# Altium PCB 20bit_40MS_ADC_DIOT.PcbDoc (part 8 of 8)
Units mm, origin at the board's own origin, x right, y up, seen from the top; angles counter-clockwise.
Board outline 222.63 x 100.1 mm, 6 copper layers (L1, L2, L3, L4, L5, L6), stack 2.522 mm thick; 616 components, 374 nets, 2097 pads, 984 vias.
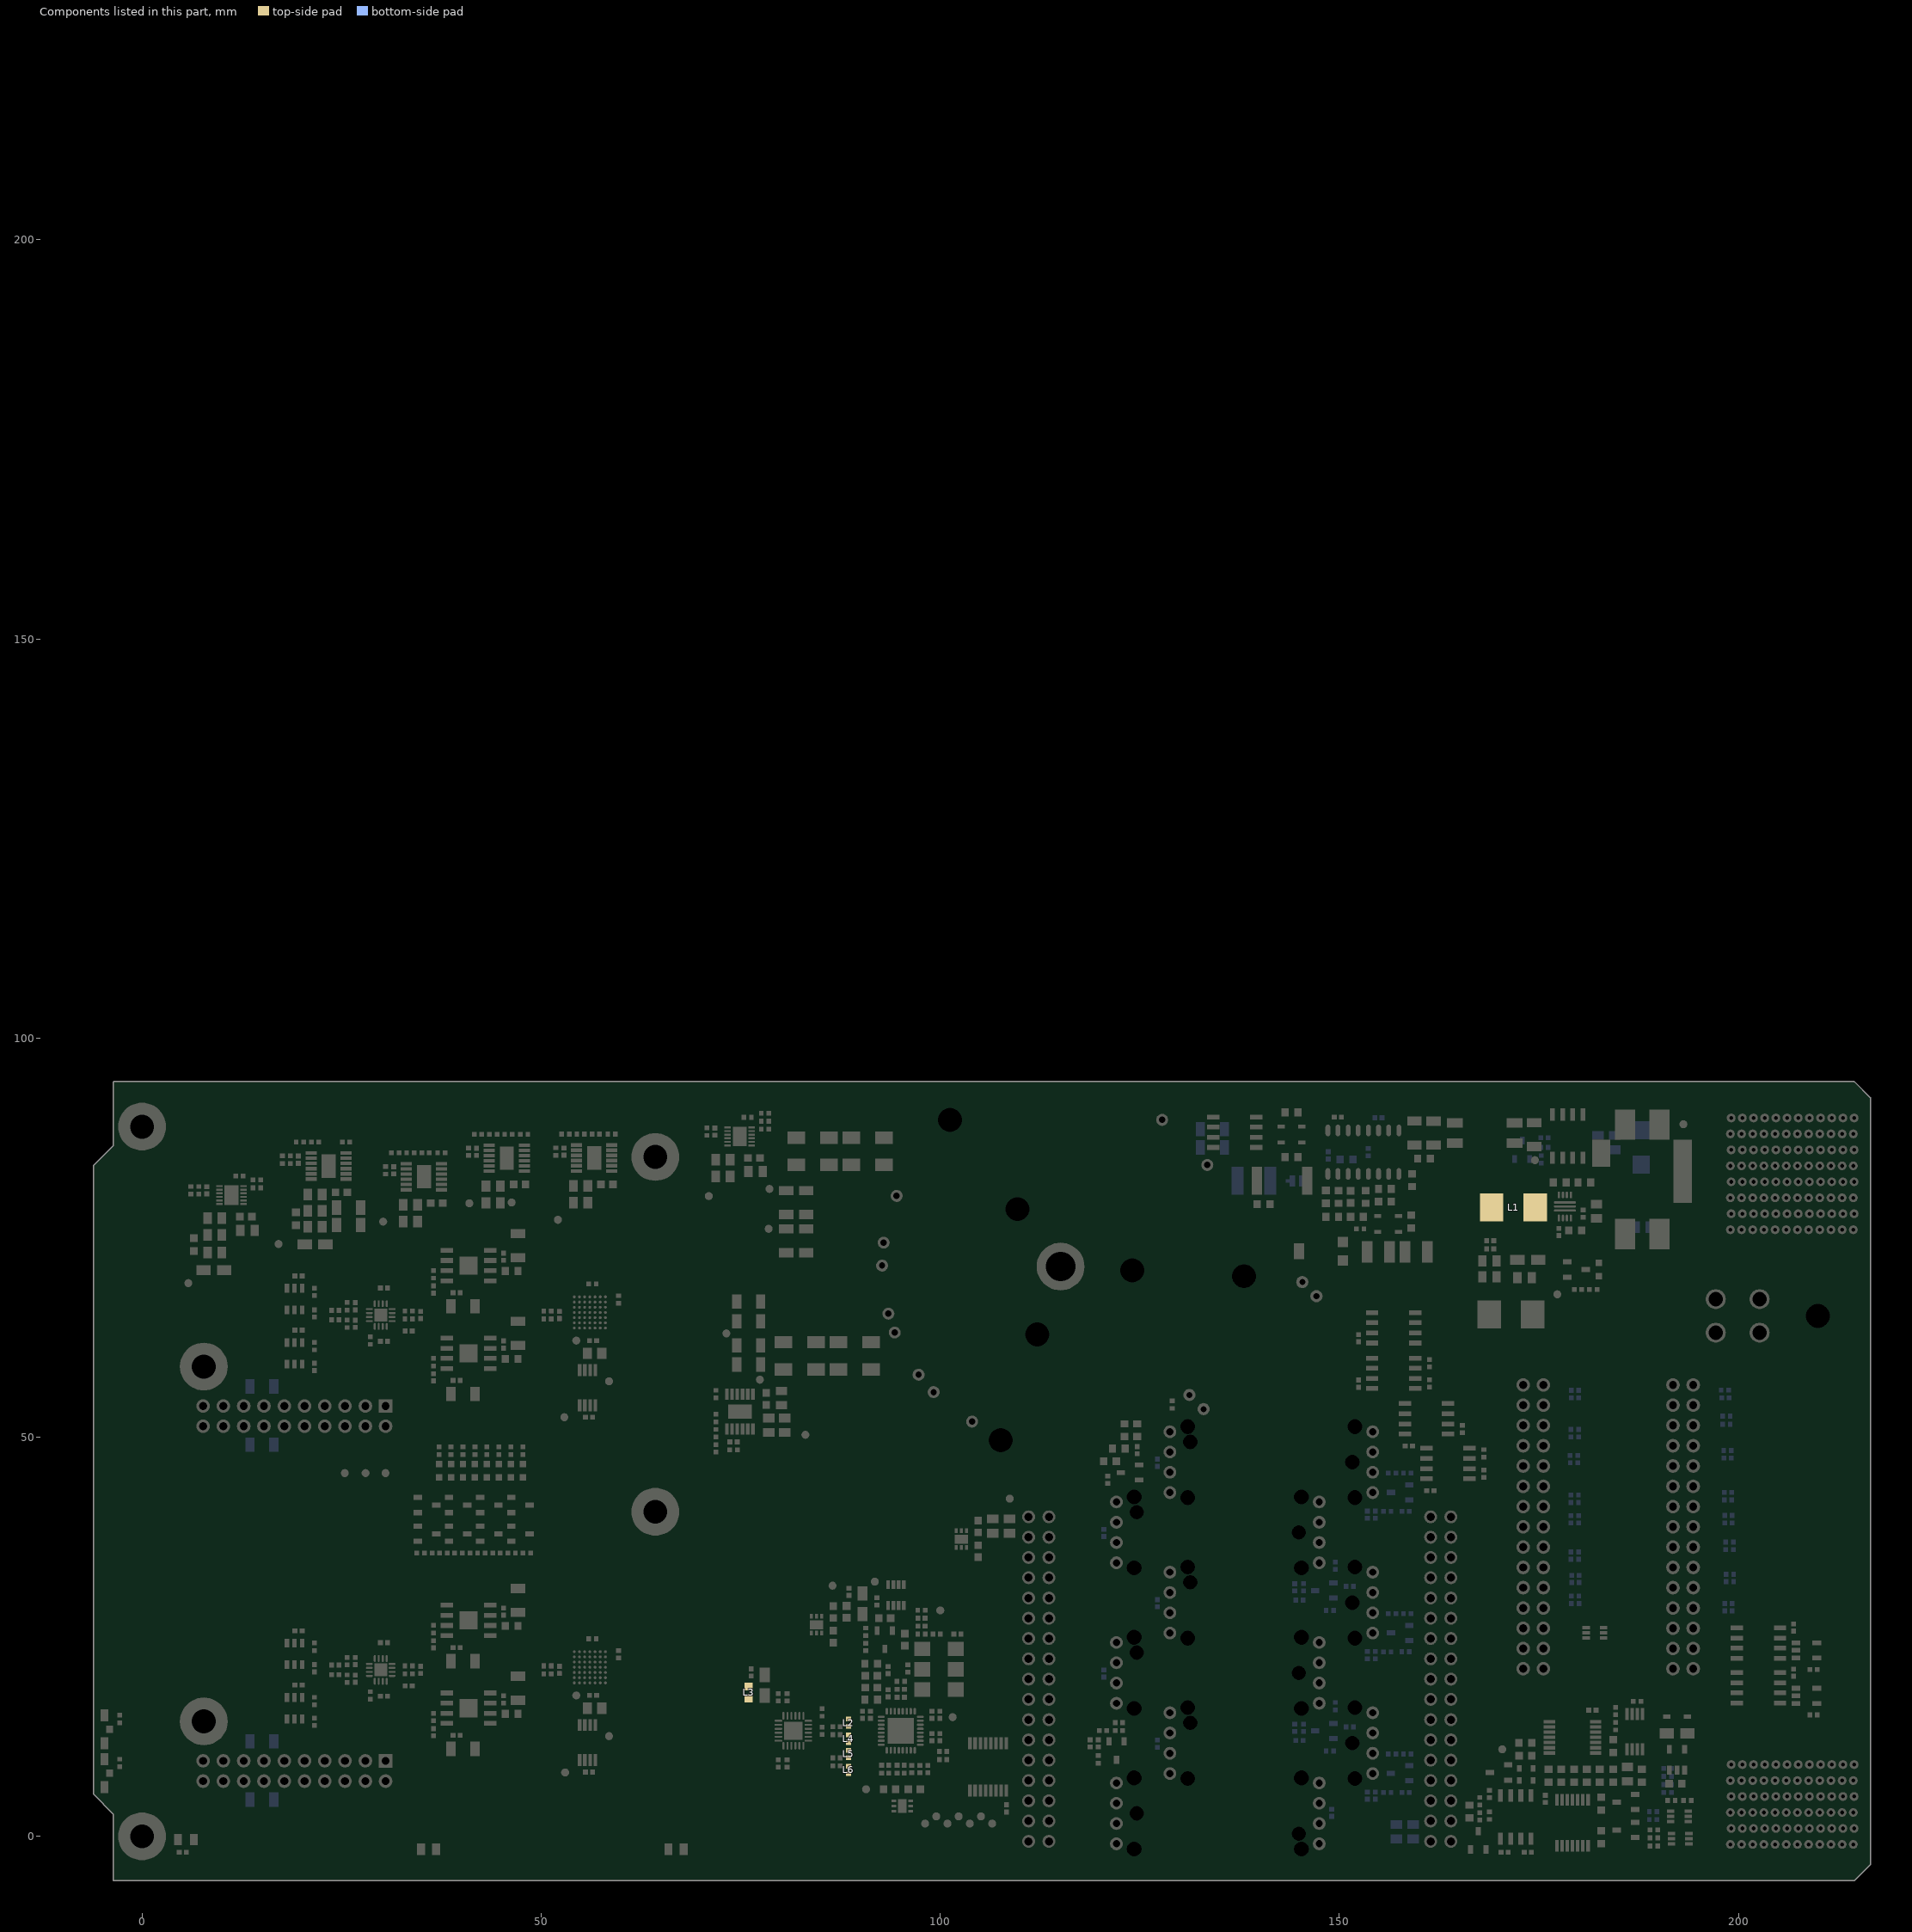
[diagram p10: the components of this part, seen from the top]

## Via types
v1: diameter 0.4, hole 0.2, L1 to L6, tented both sides, 984 vias

## Nets (pads, with @x,y where several pads share a name; then routed paths per layer and width w, separated by ;. In a path a pad name is that pad's centre, name@x,y a point inside that pad or via, vN(x,y) a via of type N, cw(c..) or ccw(c..) an arc to the next point about the centre after c; other vN are vias at no path point) (continued)
pads on no net: B36.1 B37.1 B38.1 B39.1 B40.1 B41.1 BUSH1.1 D23.5 D24.4 D24.5 D27.5 IC1A.B3 IC1A.B4 IC1A.B5 IC1A.E6 IC1A.F1 IC1A.F2 IC1A.G6 IC1A.G7 IC1B.B3 IC1B.B4 IC1B.B5 IC1B.E6 IC1B.F1 IC1B.F2 IC1B.G6 IC1B.G7 IC7.5 IC7.25 IC8.9 IC8.10 IC9.5 IC9.6 IC10.7 IC13.3 IC13.4 IC13.6 IC15.7 IC17.2 IC19.2 IC20.7 IC21.2 IC26.5 IC26.9 IC26.10 IC26.11 IC26.12 IC26.13 IC26.14 IC27.5 IC27.9 IC27.10 IC27.11 IC27.12 IC27.13 IC27.14 IC28.5 IC28.9 IC28.10 IC28.11 IC28.12 IC28.13 IC28.14 IC29.5 IC29.9 IC29.10 IC29.11 IC29.12 IC29.13 IC29.14 IC30.9 IC30.13 IC33.5 IC33.9 IC33.10 IC33.11 IC33.12 IC33.13 IC33.14 IC34.5 IC34.9 IC34.10 IC34.11 IC34.12 IC34.13 IC34.14 IC38.4 IC43.5 IC44.7 IC45.5 IC46.7 J2.5 J6.B1 J6.G3 J6.H3 J6.I2 J6.J3 J6.K3 J6.L2 J7.A3 J7.A5 J7.A7 J7.A8 J7.B2 J7.B3 J7.B4 J7.B5 J7.B6 J7.B7 J7.B8 J7.C2 J7.C4 J7.C6 J7.C8 J7.D3 J7.D5 J7.D7 J7.D8 J7.E2 J7.E3 J7.E4 J7.E5 J7.E6 J7.E7 J7.E8 J7.F2 J7.F4 J7.F6 J7.F8 J7.G3 J7.G5 J7.G7 J7.H2 J7.H3 J7.H4 J7.H5 J7.H6 J7.H7 J7.H8 J7.I2 J7.I4 J7.I6 J7.I8 J7.J3 J7.J5 J7.J7 J7.K2 J7.K3 J7.K4 J7.K5 J7.K6 J7.K7 J7.K8 J7.L2 J7.L4 J7.L6 J7.L8 LD9.3 LD11.3 M3A.1 M3B.1 M4A.1 M4B.1 MOD1.5 MOD1.6 MOD1.11 MOD1.12 MOD1.17 MOD1.18 MOD1.23 MOD1.24 MOD1.29 MOD1.30 MOD2.2 MOD2.3 MOD2.8 MOD2.9 MOD2.14 MOD2.15 MOD2.20 MOD2.21 MOD2.26 MOD2.27 OSC1.5

## Polygon pours and split planes (outlines as drawn)
GND on L1 "GND_L01_P382" (solid, pour order 382): 91.85,83.325 94.525,83.325 94.7,83.5 94.7,84.7 94.525,84.875 91.85,84.875
GND on L1 "GND_L01_P381" (solid, pour order 381): 91.85,86.725 94.525,86.725 94.7,86.9 94.7,88.1 94.525,88.275 91.85,88.275
GND on L1 "GND_L01_P380" (solid, pour order 380): 90.25,57.725 92.925,57.725 93.1,57.9 93.1,59.1 92.925,59.275 90.25,59.275
GND on L1 "GND_L01_P379" (solid, pour order 379): 90.25,61.125 92.925,61.125 93.1,61.3 93.1,62.5 92.925,62.675 90.25,62.675
P6V0 on L1 "P6V0_L01_P378" (solid, pour order 378): 72.7,59.425 73.925,58.2 75.075,58.2 75.075,67.9 73.1,67.9 72.7,67.5
GND on L1 "GND_L01_P376" (solid, pour order 376): 76.925,63.6 78.9,63.6 79.1,63.8 79.1,67.7 78.9,67.9 76.925,67.9
GND on L1 "GND_L01_P264" (solid, pour order 264): 31 vertices, not listed, extent 71.59,48.09 81.225,55.22
P15V0 on L1 "P15V0_L01_P265" (solid, pour order 265): 75.3,49.4 75.225,49.475 75.225,49.875 75,50.1 75,51.7 77.2,51.7 77.75,51.15 81.75,51.15 81.9,51 81.9,49.8 81.5,49.4
GND on L1 "GND_L01_P375" (solid, pour order 375): 79.8,73.675 79.8,71.7 80,71.5 83.9,71.5 84.1,71.7 84.1,73.675
N6V0 on L1 "N6V0_L01_P374" (solid, pour order 374): 79.8,78.475 79.8,75.525 84.1,75.525 84.1,78.475
GND on L1 "GND_L01_P365" (solid, pour order 365): 27 vertices, not listed, extent 4.8,49.6 60.4,76.7
no net on L1 "BALANCE" (solid, pour order 373): -3.6,91.8 -3.6,86.515 -6.081,84.035 -6.081,5.284 -3.6,2.803 -3.6,-2.901 216.483,-2.9 216.483,91.8
GND on L1 "GND_L01_P368" (solid, pour order 368): 27 vertices, not listed, extent 4.8,5.15 60.4,32.25
P3V3_MP on L1 "P3V3_MP_L01_P361" (solid, pour order 361): 193.15,14.75 192.9,15 192.9,16.1 193.1,16.3 194.1,16.3 194.3,16.1 194.3,15 194.05,14.75
P3V3_DIOT on L1 "P3V3_DIOT_L01_P360" (solid, pour order 360): 191.65,10.35 191.65,12.025 191.9,12.275 191.9,15 191.65,15.25 189.55,15.25 188.9,14.6 188.9,14.1 188.3,13.5 188.3,12.5 188.9,11.9 190.6,11.9 191.05,11.45 191.05,10.35
GND_DIOT on L1 "GND_DIOT_L01_P355" (solid, pour order 355): 177.025,79.55 178.55,79.55 178.85,79.85 178.85,80.625 180.275,80.625 180.5,80.4 180.5,79.5 180.25,79.25 177.025,79.25
GND_DIOT on L1 "GND_DIOT_L01_P354" (solid, pour order 354): 178.85,77.725 179,77.875 179.05,77.925 182.9,77.925 182.9,76.4 182.8,76.3 181.6,76.3 181,76.9 179.125,76.9 178.85,77.175
P5V0 on L1 "P5V0_L01_P232" (solid, pour order 232): 21 vertices, not listed, extent 42.825,60.835 48.7,62.408
P6V0 on L1 "P6V0_L01_P352" (solid, pour order 352): 17 vertices, not listed, extent 101.819,34.3 106.6,36.466
P3V3_ISO on L1 "P3V3_ISO_L01_P351" (solid, pour order 351): 103.119,37.966 103.119,40.119 104.2,41.2 114.2,41.2 114.5,40.9 114.5,39.3 114.2,39 109.618,39 109.527,39.091 103.994,39.091 103.469,38.566 103.469,37.966
GND on L1 "GND_L01_P350" (solid, pour order 350): 23 vertices, not listed, extent 101.794,35.866 114.5,38.541
GND on L1 "GND_L01_P349" (solid, pour order 349): 89.625,29.525 89.625,30 88.86,30.765 87.635,30.765 87.5,30.9 87.5,31.9 87.6,32 90.8,32 90.875,31.925 90.875,29.525
P6V0 on L1 "P6V0_L01_P344" (solid, pour order 344): 87.075,23.225 86.9,23.05 86,23.05 85.8,23.25 85.8,23.65 85.675,23.775 84.975,24.475 84.975,25.75 85.325,25.75 85.325,25.525 86.125,24.725 87.075,24.725
P3V0_REFA on L1 "P3V0_REFA_L01_P339" (solid, pour order 339): 17 vertices, not listed, extent 55.225,13.2 56.375,19.875
P3V3_CLK on L1 "P3V3_CLK_L01_P338" (solid, pour order 338): 76.5,18.275 74.925,18.275 74.6,18.6 74.6,20.1 74.885,20.385 76.61,20.385 76.61,19.385 76.5,19.275
AD9508BCPZ_VDD on L1 "AD9508BCPZ_VDD_L01_P337" (solid, pour order 337): 17 vertices, not listed, extent 75.5,14.75 80.475,18.525
GND on L1 "GND_L01_P336" (solid, pour order 336): 80.01,17.565 80.01,20.69 79.575,21.125 78.675,21.125 78.515,21.285 75.99,21.285 75.99,20.665 76.935,20.665 77.375,20.225 77.375,19.325 78.625,19.325 79.39,18.56 79.39,17.565
GND on L1 "GND_L01_P335" (solid, pour order 335): 96.75,17.485 99.185,17.485 99.4,17.7 99.4,19.1 99.215,19.285 96.75,19.285
P3V3_CLK on L1 "P3V3_CLK_L01_P334" (solid, pour order 334): 85.325,27.25 85.325,27.575 86.125,28.375 88.75,28.375 88.75,29.755 88.86,29.865 88.86,30.485 85.985,30.485 84.975,29.475 84.975,27.25
GND on L1 "GND_L01_P333" (solid, pour order 333): 83.65,25.95 84.125,25.95 84.325,25.75 84.325,25.15 84.675,25.15 84.675,25.75 84.875,25.95 85.45,25.95 86.125,25.275 87.075,25.275 87.075,27.825 86.125,27.825 85.35,27.05 83.65,27.05
P6V0 on L1 "P6V0_L01_P332" (solid, pour order 332): 98.525,6.375 98.7,6.2 98.7,5.3 98.5,5.1 98.1,5.1 97.975,4.975 97.275,4.275 96,4.275 96,4.625 96.225,4.625 97.025,5.425 97.025,6.375
GND on L1 "GND_L01_P331" (solid, pour order 331): 27 vertices, not listed, extent 93.23,2.95 96.6,10.775
P3V3_VCCO on L1 "P3V3_VCCO_L01_P330" (solid, pour order 330): 18 vertices, not listed, extent 91.7,4.275 94.5,11.625
P18V0 on L1 "L1-P18V0" (solid, pour order 329): 78.986,62.675 76.875,62.675 76.522,62.322 76.522,56.508 76.115,56.1 75,56.1 75,54.7 76.765,54.7 77.14,55.075 78.69,55.075 78.89,55.275 80.8,55.275 80.8,57.075 81.45,57.725 81.45,62.675
P3V0_REFA on L1 "P3V0_REFA_L01_P246" (solid, pour order 246): 17 vertices, not listed, extent 55.225,13.2 56.375,19.875
P6V0 on L1 "P6V0_L01_P249" (solid, pour order 249): 54.81,8.26 55.11,8.26 55.25,8.4 55.25,10.3 55.7,10.3 55.7,8.75 55.86,8.59 55.86,7.31 55.7,7.15 54.9,7.15 54.7,7.35 54.7,8.15
N5V0 on L1 "N5V0_L01_P318" (solid, pour order 318): 18.825,16.85 19.375,16.85 19.375,17.95 19.46,18.035 19.46,19.913 19.286,20.087 18.486,20.087 18.186,19.787 18.186,18.687 18.386,18.487 18.586,18.487 18.825,18.248
N5V0 on L1 "N5V0_L01_P238" (solid, pour order 238): 18.825,23.65 19.375,23.65 19.375,24.75 19.46,24.835 19.46,26.713 19.286,26.887 18.486,26.887 18.186,26.587 18.186,25.487 18.386,25.287 18.586,25.287 18.825,25.048
N5V0 on L1 "N5V0_L01_P324" (solid, pour order 324): 39.275,12.945 40.175,13.845 44.375,13.845 44.375,14.445 37.425,14.445 37.425,13.233 37.775,12.883 37.9,12.758 37.9,12.058 37.5,11.658 37.5,10.258 37.708,10.05 39.275,10.05 39.275,11.85
N5V0 on L1 "N5V0_L01_P235" (solid, pour order 235): 39.275,23.945 40.175,24.845 44.375,24.845 44.375,25.445 37.425,25.445 37.425,24.233 37.775,23.883 37.9,23.758 37.9,23.058 37.5,22.658 37.5,21.258 37.708,21.05 39.275,21.05 39.275,22.85
P5V0 on L1 "P5V0_L01_P241" (solid, pour order 241): 20.749,20.95 19.775,20.95 19.775,22.05 20.949,22.05 21.486,22.587 22.586,22.587 22.786,22.387 22.786,21.387 22.589,21.19 20.989,21.19
P5V0 on L1 "P5V0_L01_P321" (solid, pour order 321): 20.749,14.15 19.775,14.15 19.775,15.25 20.949,15.25 21.486,15.787 22.586,15.787 22.786,15.587 22.786,14.587 22.589,14.39 20.989,14.39
P5V0 on L1 "P5V0_L01_P231" (solid, pour order 231): 21 vertices, not listed, extent 42.825,16.385 48.7,17.958
P5V0 on L1 "P5V0_L01_P244" (solid, pour order 244): 21 vertices, not listed, extent 42.825,27.385 48.7,28.958
P6V0 on L1 "P6V0_L01_P248" (solid, pour order 248): 54.81,8.26 55.11,8.26 55.25,8.4 55.25,10.3 55.7,10.3 55.7,8.75 55.86,8.59 55.86,7.31 55.7,7.15 54.9,7.15 54.7,7.35 54.7,8.15
P5V0 on L1 "P5V0_L01_P243" (solid, pour order 243): 21 vertices, not listed, extent 42.825,27.385 48.7,28.958
P5V0 on L1 "P5V0_L01_P240" (solid, pour order 240): 20.749,20.95 19.775,20.95 19.775,22.05 20.949,22.05 21.486,22.587 22.586,22.587 22.786,22.387 22.786,21.387 22.589,21.19 20.989,21.19
P5V0 on L1 "P5V0_L01_P320" (solid, pour order 320): 20.749,14.15 19.775,14.15 19.775,15.25 20.949,15.25 21.486,15.787 22.586,15.787 22.786,15.587 22.786,14.587 22.589,14.39 20.989,14.39
N5V0 on L1 "N5V0_L01_P323" (solid, pour order 323): 39.275,12.945 40.175,13.845 44.375,13.845 44.375,14.445 37.425,14.445 37.425,13.233 37.775,12.883 37.9,12.758 37.9,12.058 37.5,11.658 37.5,10.258 37.708,10.05 39.275,10.05 39.275,11.85
N5V0 on L1 "N5V0_L01_P234" (solid, pour order 234): 39.275,23.945 40.175,24.845 44.375,24.845 44.375,25.445 37.425,25.445 37.425,24.233 37.775,23.883 37.9,23.758 37.9,23.058 37.5,22.658 37.5,21.258 37.708,21.05 39.275,21.05 39.275,22.85
N5V0 on L1 "N5V0_L01_P317" (solid, pour order 317): 18.825,16.85 19.375,16.85 19.375,17.95 19.46,18.035 19.46,19.913 19.286,20.087 18.486,20.087 18.186,19.787 18.186,18.687 18.386,18.487 18.586,18.487 18.825,18.248
N5V0 on L1 "N5V0_L01_P237" (solid, pour order 237): 18.825,23.65 19.375,23.65 19.375,24.75 19.46,24.835 19.46,26.713 19.286,26.887 18.486,26.887 18.186,26.587 18.186,25.487 18.386,25.287 18.586,25.287 18.825,25.048
N5V0 on L1 "N5V0_L01_P322" (solid, pour order 322): 39.275,57.395 40.175,58.295 44.375,58.295 44.375,58.895 37.425,58.895 37.425,57.683 37.775,57.333 37.9,57.208 37.9,56.508 37.5,56.108 37.5,54.708 37.708,54.5 39.275,54.5 39.275,56.3
N5V0 on L1 "N5V0_L01_P236" (solid, pour order 236): 18.825,68.1 19.375,68.1 19.375,69.2 19.46,69.285 19.46,71.163 19.286,71.337 18.486,71.337 18.186,71.037 18.186,69.937 18.386,69.737 18.586,69.737 18.825,69.498
P5V0 on L1 "P5V0_L01_P239" (solid, pour order 239): 20.749,65.4 19.775,65.4 19.775,66.5 20.949,66.5 21.486,67.037 22.586,67.037 22.786,66.837 22.786,65.837 22.589,65.64 20.989,65.64
P5V0 on L1 "P5V0_L01_P319" (solid, pour order 319): 20.749,58.6 19.775,58.6 19.775,59.7 20.949,59.7 21.486,60.237 22.586,60.237 22.786,60.037 22.786,59.037 22.589,58.84 20.989,58.84
N5V0 on L1 "N5V0_L01_P316" (solid, pour order 316): 18.825,61.3 19.375,61.3 19.375,62.4 19.46,62.485 19.46,64.363 19.286,64.537 18.486,64.537 18.186,64.237 18.186,63.137 18.386,62.937 18.586,62.937 18.825,62.698
P12V0_EEM on L1 "P12V0_EEM_L01_P314" (solid, pour order 314): 178.25,78.55 180.03,78.55 180.9,79.42 180.9,80.5 181.2,80.8 183.3,80.8 183.5,80.6 183.5,80.1 184,79.6 184,78.9 183.24,78.14 180.24,78.14 180.13,78.25 178.25,78.25
GND_DIOT on L1 "GND_DIOT_L01_P300" (solid, pour order 300): 167.375,69.4 167.375,70.325 166.6,71.1 166.6,74.5 167.01,74.91 168.76,74.91 168.76,73.135 168.425,72.8 168.425,69.4
3V3 on L1 "3V3_L01_P301" (solid, pour order 301): 169.04,74.91 167.6,76.35 167.6,80.55 170.55,80.55 170.55,71.725 170.225,71.4 170.225,69.4 170.25,69.375 170.25,63.65 167.3,63.65 167.3,67.15 167.55,67.15 169.175,68.775 169.175,72.8 169.04,72.935
P3V3 on L1 "P3V3_L01_P302" (solid, pour order 302): 172.75,63.65 172.75,67.45 173.575,68.275 173.575,70.7 174,71.125 174,72.825 176.675,72.825 177,72.5 177,70.2 175.7,68.9 175.7,63.65
GND_DIOT on L1 "GND_DIOT_L01_P303" (solid, pour order 303): 172.825,69.3 172.825,71.2 173.2,71.575 173.2,72.825 171.4,72.825 171.1,72.525 171.1,69.5 171.3,69.3 171.775,69.3
NetIC36_2 on L1 "NETIC36_2_L01_P299" (solid, pour order 299): 173.05,77.05 176,77.05 176.4,77.45 176.4,78.4 176.75,78.75 178.25,78.75 178.25,79.05 176.75,79.05 176.4,79.4 176.4,80.15 176,80.55 173.05,80.55
NetC172_2 on L1 "NETC172_2_L01_P310" (solid, pour order 310): 184.55,73.55 184.55,78.55 184.9,78.9 186.7,78.9 187.05,78.55 187.05,73.55
NetC172_1 on L1 "NETC172_1_L01_P309" (solid, pour order 309): 188.85,73.55 188.85,78.55 189.2,78.9 191,78.9 191.35,78.55 191.35,73.55
GND_DIOT on L1 "GND_DIOT_L01_P307" (solid, pour order 307): 17 vertices, not listed, extent 181.65,79.35 194.15,91.05
P12V0_EEM on L1 "P12V0_EEM_L01_P305" (solid, pour order 305): 177.665,91.465 177.9,91.7 186.6,91.7 187.05,91.25 187.05,87.25 184.55,87.25 184.55,88.05 184.2,88.4 178.3,88.4 177.665,89.035
NetB15_1 on L1 "NETB15_1_L01_P304" (solid, pour order 304): 170.95,87.43 175.77,87.43 176.9,86.3 180.6,86.3 180.805,86.095 180.805,84.225 180.48,83.9 171.8,83.9 170.95,84.75 170.95,86.23
GND_DIOT on L1 "GND_DIOT_L01_P298" (solid, pour order 298): 172.95,88.77 172.95,90.045 173,90.095 173,90.52 172.85,90.67 171.05,90.67 170.9,90.52 170.9,90.095 170.95,90.045 170.95,88.77
GND_DIOT on L1 "GND_DIOT_L01_P297" (solid, pour order 297): 175.3,88.825 175.3,89.975 175.4,90.075 175.4,90.6 175.3,90.7 173.5,90.7 173.4,90.6 173.4,90.075 173.5,89.975 173.5,88.825
NetC137_2 on L1 "NETC137_2_L01_P295" (solid, pour order 295): 154.175,71.85 152.25,71.85 152.1,72 152.1,74.4 152.25,74.55 154.175,74.55
GND_LLC on L1 "GND_LLC_L01_P293" (solid, pour order 293): 145.3,80.35 147.05,80.35 147.2,80.5 147.2,83.7 147.05,83.85 145.3,83.85
P12V0_LLC on L1 "P12V0_LLC_L01_P291" (solid, pour order 291): 160.95,83.05 161.1,82.9 162.9,82.9 163.2,83.2 163.2,85.3 163.6,85.7 164.92,85.7 165.45,86.23 165.45,87.43 161.155,87.43 160.9,87.175 160.9,85.45 160.95,85.4
LLC_VCC on L1 "LLC_VCC_L01_P290" (solid, pour order 290): 154.425,87.175 153.935,87.665 153.935,88.425 153.335,88.425 153.335,86.265 154,85.6 158.65,85.6 159.4,84.85 159.4,84.45 159.35,84.4 160.25,84.4 160.25,85.4 160.3,85.45 160.3,87.175
GND_LLC on L1 "GND_LLC_L01_P289" (solid, pour order 289): 17 vertices, not listed, extent 155.4,88.425 165.45,91.4
NetC137_1 on L1 "NETC137_1_L01_P287" (solid, pour order 287): 139,80.35 139.25,80.1 139.25,78.7 140.15,78.7 140.15,80.2 140.3,80.35 142.85,80.35 143,80.5 143,83.7 142.85,83.85 139,83.85
LLC_OUT on L1 "LLC_OUT_L01_P286" (solid, pour order 286): 20 vertices, not listed, extent 126.7,85.995 140.375,90.9
P12V0_LLC on L1 "P12V0_LLC_L01_P283" (solid, pour order 283): 134.975,87.865 132.735,87.865 132,88.6 130.7,88.6 130.4,88.3 130.4,85.7 130.7,85.4 134.6,85.4 134.975,85.775 134.975,86.595
STRIP2 on L1 "esd1" (solid, pour order 280): 66.643,-3.243 66.45,-3.05 66.45,-0.875 65.45,-0.875 65.45,-3.05 65.257,-3.243 42.58,-3.243 42.58,-4.512 97.58,-4.512 97.58,-3.243
STRIP3 on L1 "STRIP3_L01_P279" (solid, pour order 279): 215.113,-4.512 215.13,-4.512 216.37,-3.272 117.58,-3.272 117.58,-4.512
STRIP1 on L1 "esd1" (solid, pour order 278): 35.6,-3.1 35.45,-2.95 35.45,-0.875 34.45,-0.875 34.45,-2.95 34.3,-3.1 4.955,-3.1 4.955,1.563 -2.17,1.563 -2.17,-4.462 37.58,-4.462 37.58,-3.1
P6V0 on L1 "P6V0_L01_P257" (solid, pour order 257): 37.193,78.35 37.318,78.225 38.518,78.225 38.818,78.525 38.818,82.325 38.618,82.525 36.818,82.525 36.818,80.175 37.193,79.8
P6V0 on L1 "P6V0_L01_P260" (solid, pour order 260): 24.875,84.513 27.287,84.513 27.95,83.85 27.95,83.187 27.95,75.662 25.975,75.662 25.775,75.862 25.775,79.662 25.25,80.187 25.25,81.137 24.875,81.512
P6V0 on L1 "P6V0_L01_P251" (solid, pour order 251): 47.568,80.675 47.693,80.55 48.893,80.55 49.193,80.85 49.193,84.65 48.993,84.85 47.193,84.85 47.193,82.5 47.568,82.125
P6V0 on L1 "P6V0_L01_P250" (solid, pour order 250): 58.518,80.7 58.643,80.575 59.843,80.575 60.143,80.875 60.143,84.675 59.943,84.875 58.143,84.875 58.143,82.525 58.518,82.15
P6V0 on L1 "P6V0_L01_P247" (solid, pour order 247): 54.81,52.71 55.11,52.71 55.25,52.85 55.25,54.75 55.7,54.75 55.7,53.2 55.86,53.04 55.86,51.76 55.7,51.6 54.9,51.6 54.7,51.8 54.7,52.6
P2V5_VREF on L1 "P2V5_VREF_L01_P275" (solid, pour order 275): 20 vertices, not listed, extent 90.34,24.9 96.025,29.475
P3V3_DAC on L1 "P3V3_DAC_L01_P276" (solid, pour order 276): 24 vertices, not listed, extent 87.75,23.865 93.7,29.475
GND on L1 "GND_L01_P258" (solid, pour order 258): 33 vertices, not listed, extent 30.208,76.3 37.308,85.935
P3V3_ADC on L1 "P3V3_ADC_L01_P259" (solid, pour order 259): 31.518,82.225 31.593,82.3 31.993,82.3 32.218,82.525 33.818,82.525 33.818,80.325 33.268,79.775 33.268,75.775 33.118,75.625 31.918,75.625 31.518,76.025
N5V0 on L1 "N5V0_L01_P274" (solid, pour order 274): 8.75,73.85 6.05,73.85 6,73.8 6,70.725 6.425,70.3 8.6,70.3 8.6,72.25 8.75,72.4
GND on L1 "GND_L01_P273" (solid, pour order 273): 17 vertices, not listed, extent 5.79,80.025 10.1,80.825
GND on L1 "GND_L01_P272" (solid, pour order 272): 9.45,72.4 9.4,72.35 9.4,70.3 11.2,70.3 11.2,71.525 12.475,72.8 12.475,74.6 12.825,74.95 12.825,76.625 12.725,76.725 12.725,78.1 12.675,78.15 9.45,78.15
N6V0 on L1 "N6V0_L01_P271" (solid, pour order 271): 17 vertices, not listed, extent 10.325,75.225 14.625,81.55
LT3094_N5V0 on L1 "LT3094_N5V0_L01_P270" (solid, pour order 270): 7.65,74.6 7.5,74.45 6,74.45 6,75.825 7.4,77.225 7.4,78.925 8.3,79.825 9.15,79.825 9.3,79.975 9.3,80.225 10.1,80.225 10.1,79.075 9.675,79.075 8.75,78.15 8.75,74.6
GND on L1 "GND_L01_P269" (solid, pour order 269): 70.458,87.515 72.128,87.515 72.268,87.375 72.668,87.375 72.768,87.475 72.768,87.675 72.868,87.775 73.768,87.775 73.768,88.025 72.818,88.025 72.668,88.175 72.118,88.175 72.078,88.135 70.498,88.135 70.458,88.095
GND on L1 "GND_L01_P268" (solid, pour order 268): 73.118,81.95 73.118,85.5 76.343,85.5 76.393,85.45 76.393,84.075 76.493,83.975 76.493,82.3 76.143,81.95
N18V0 on L1 "N18V0_L01_P267" (solid, pour order 267): 26 vertices, not listed, extent 73.993,80.325 84.1,88.9
N15V0 on L1 "N15V0_L01_P266" (solid, pour order 266): 18 vertices, not listed, extent 70.6,81.3 73.768,87.575
P5V0 on L1 "P5V0_L01_P263" (solid, pour order 263): 18.825,77.087 21.325,77.087 21.325,74.837 21.275,74.787 21.275,73.537 18.7,73.537 18.275,73.962 18.275,76.537
LT3045_P5V0 on L1 "LT3045_P5V0_L01_P262" (solid, pour order 262): 21.325,77.637 18.825,77.637 18.775,77.687 18.775,79.762 19.575,80.562 19.575,83.562 19.65,83.637 20.05,83.637 20.275,83.862 21.875,83.862 21.875,81.663 21.325,81.112
GND on L1 "GND_L01_P261" (solid, pour order 261): 37 vertices, not listed, extent 17.265,73.537 25.365,87.272
GND on L1 "GND_L01_P253" (solid, pour order 253): 33 vertices, not listed, extent 40.583,78.625 47.683,88.26
P1V1_VDD on L1 "P1V1_VDD_L01_P255" (solid, pour order 255): 41.893,84.55 41.968,84.625 42.368,84.625 42.593,84.85 44.193,84.85 44.193,82.65 43.643,82.1 43.643,78.1 43.493,77.95 42.293,77.95 41.893,78.35
P1V1_IO on L1 "P1V1_IO_L01_P254" (solid, pour order 254): 52.843,84.575 52.918,84.65 53.318,84.65 53.543,84.875 55.143,84.875 55.143,82.675 54.593,82.125 54.593,78.125 54.443,77.975 53.243,77.975 52.843,78.375
GND on L1 "GND_L01_P252" (solid, pour order 252): 33 vertices, not listed, extent 51.533,78.65 58.633,88.285
P3V0_REFB on L1 "P3V0_REFB_L01_P245" (solid, pour order 245): 17 vertices, not listed, extent 55.225,57.65 56.375,64.325
P5V0 on L1 "P5V0_L01_P242" (solid, pour order 242): 21 vertices, not listed, extent 42.825,71.835 48.7,73.408
N5V0 on L1 "N5V0_L01_P233" (solid, pour order 233): 39.275,68.395 40.175,69.295 44.375,69.295 44.375,69.895 37.425,69.895 37.425,68.683 37.775,68.333 37.9,68.208 37.9,67.508 37.5,67.108 37.5,65.708 37.708,65.5 39.275,65.5 39.275,67.3
no net on L6 "BALANCE" (solid, pour order 372): -3.6,91.8 -3.6,86.515 -6.081,84.035 -6.081,5.284 -3.6,2.803 -3.6,-2.901 216.483,-2.9 216.483,91.8
P12V0_EEM on L6 "L6-P12V0_EEM" (solid, pour order 364): 48 vertices, not listed, extent 168.5,5.19 195.6,90.7
GND_DIOT on L6 "GND_DIOT_L06_P357" (solid, pour order 357): 156.407,0.925 156.407,2.607 156.8,3 164.5,3 165,2.5 165,1.2 164.5,0.7 156.632,0.7
P3V3 on L6 "P3V3_L06_P356" (solid, pour order 356): 156.407,0.225 164.475,0.225 164.8,-0.1 164.8,-1.1 164.4,-1.5 156.6,-1.5 156.407,-1.307
P15V0 on L6 "P15V0_L06_P353" (solid, pour order 353): 76.1,46.8 80.6,51.3 81.8,51.3 82.6,50.5 82.6,49.5 77.4,44.3 61.6,44.3 58.4,41.1 55.1,41.1 54.4,41.8 54.4,43.2 55.1,43.9 57.4,43.9 60.3,46.8
P1V1_VDD on L6 "P1V1_VDD_L06_P327" (solid, pour order 327): 41.9,79.7 41.9,78.3 42.3,77.9 43.4,77.9 43.7,78.2 43.7,79.7 43.5,79.9 42.1,79.9
P1V1_VDD on L6 "P1V1_VDD_L06_P326" (solid, pour order 326): 53.7,67.35 53.3,67.75 53.3,68.75 53.5,68.95 55.5,68.95 55.7,68.75 55.7,67.55 55.5,67.35 55.4,67.35
P1V1_VDD on L6 "P1V1_VDD_L06_P325" (solid, pour order 325): 53.7,22.9 53.3,23.3 53.3,24.3 53.5,24.5 55.5,24.5 55.7,24.3 55.7,23.1 55.5,22.9 55.4,22.9
P12V0_DIOT on L6 "P12V0_DIOT_L06_P315" (solid, pour order 315): 45 vertices, not listed, extent 191.3,-2.8 215.9,8.81
NetC172_2 on L6 "NETC172_2_L06_P312" (solid, pour order 312): 17 vertices, not listed, extent 184.6,61.5 199,78.9
NetC172_1 on L6 "NETC172_1_L06_P311" (solid, pour order 311): 201,68.2 197.9,71.3 192.625,71.3 188.35,75.575 188.35,78.55 188.7,78.9 191,78.9 195.9,74 199.7,74 204.5,69.2 204.5,62 204,61.5 201.5,61.5 201,62
GND_DIOT on L6 "GND_DIOT_L06_P308" (solid, pour order 308): 181.675,86.55 181.675,83.825 182.5,83 188.875,83 188.875,85.3 186.475,85.3 185.225,86.55
NetC137_2 on L6 "NETC137_2_L06_P296" (solid, pour order 296): 152.8,75.1 151.2,76.7 141,76.7 138,79.7 138,83.85 134.95,83.85 133.9,84.9 133,84.9 132.3,84.2 132.3,79.4 140.2,71.5 152.5,71.5 152.8,71.8 152.8,73.9
GND_LLC on L6 "GND_LLC_L06_P294" (solid, pour order 294): 147.2,80.6 147,80.4 145.2,80.4 144.95,80.65 144.95,83.65 145.2,83.9 147,83.9 147.2,83.7
LLC_OUT on L6 "LLC_OUT_L06_P292" (solid, pour order 292): 144.5,86.6 143.8,85.9 140.4,85.9 140.2,86.1 140.2,87.3 141.3,88.4 151.2,88.4 151.7,87.9 151.7,86.6 151.5,86.4 150.4,86.4 150.2,86.6
NetC137_1 on L6 "NETC137_1_L06_P288" (solid, pour order 288): 20 vertices, not listed, extent 137.6,80.35 144.45,89.4
GND_LLC on L6 "GND_LLC_L06_P285" (solid, pour order 285): 136.175,89.5 136.175,86.425 137,85.6 137,84.9 136.6,84.5 134.9,84.5 134.3,85.1 134.3,89.2 134.6,89.5
P12V0_LLC on L6 "P12V0_LLC_L06_P284" (solid, pour order 284): 133.175,85.4 130.7,85.4 130.4,85.7 130.4,88.3 130.7,88.6 131.7,88.6 132.025,88.925 132.025,89.5 133.175,89.5
STRIP2 on L6 "esd1" (solid, pour order 282): 66.643,-3.243 66.4,-3 66.4,-2.5 66.3,-2.4 65.6,-2.4 65.5,-2.5 65.5,-3 65.257,-3.243 42.58,-3.243 42.58,-4.512 97.58,-4.512 97.58,-3.243
STRIP3 on L6 "STRIP3_L06_P281" (solid, pour order 281): 215.113,-4.512 215.13,-4.512 216.37,-3.272 117.58,-3.272 117.58,-4.512
STRIP1 on L6 "esd1" (solid, pour order 277): -2.17,0.978 4.955,0.978 4.955,-2.962 37.58,-2.962 37.58,-4.462 -2.17,-4.462
GND_DIOT on L6 "GND_DIOT_L06_P256" (solid, pour order 256): 202.2,47.714 202.2,41.789 216.2,41.789 216.2,47.714
no net on L4 "BALANCE" (solid, pour order 371): -3.6,91.8 -3.6,86.515 -6.081,84.035 -6.081,5.284 -3.6,2.803 -3.6,-2.901 216.483,-2.9 216.483,91.8
P12V0_LLC on L4 "P12V0_LLC_L04_P369" (solid, pour order 369): 129.8,83.5 133.8,79.5 134,79.7 155.1,79.7 155.8,80.4 161.2,80.4 163.7,82.9 163.7,90.8 162.3,92.2 132.1,92.2 129.8,89.9 129.8,87.5
P3V3_MP on L4 "P3V3_MP_L04_P362" (solid, pour order 362): 29 vertices, not listed, extent 183.2,10.3 210.7,22.2
P3V3_DIOT on L4 "P3V3_DIOT_L04_P359" (solid, pour order 359): 24 vertices, not listed, extent 165.8,-2.7 192,13.7
P3V3 on L4 "P3V3_L04_P358" (solid, pour order 358): 38 vertices, not listed, extent 143.3,-2.3 177,72.8
AD9508BCPZ_VDD on L4 "AD9508BCPZ_VDD_L04_P348" (solid, pour order 348): 77.3,17.1 76.4,16.2 76.4,10 77.4,9 80,9 80.6,9.6 80.6,13.6 81.5,14.5 85.9,14.5 86.5,15.1 86.5,16.5 85.9,17.1 82.2,17.1
P3V3_VCCO on L4 "P3V3_VCCO_L04_P347" (solid, pour order 347): 88.3,6.3 87.1,7.5 87.1,15.1 87.5,15.5 88.3,15.5 88.7,15.1 88.7,8.4 89.3,7.8 92.8,7.8 93.1,7.5 93.1,6.8 92.6,6.3
P3V3_DAC on L4 "P3V3_DAC_L04_P346" (solid, pour order 346): 87.8,23.3 90.1,21 102,21 102.9,21.9 102.9,26.5 101.6,27.8 91.5,27.8 90.7,27 88.4,27 87.8,26.4
P3V3_CLK on L4 "P3V3_CLK_L04_P345" (solid, pour order 345): 21 vertices, not listed, extent 74.2,10.8 101.3,32.8
P6V0 on L4 "P6V0_L04_P343" (solid, pour order 343): 71 vertices, not listed, extent 25.6,4.6 106.7,83.8
P5V0 on L4 "P5V0_L04_P342" (solid, pour order 342): 55 vertices, not listed, extent 12,7.7 50.3,76.2
N5V0 on L4 "N5V0_L04_P341" (solid, pour order 341): 46 vertices, not listed, extent 5,9.3 39.7,73
P3V3_ADC on L4 "P3V3_ADC_L04_P340" (solid, pour order 340): 24 vertices, not listed, extent 31.4,17.4 56.1,77.5
no net on L3 "BALANCE" (solid, pour order 370): -3.6,91.8 -3.6,86.515 -6.081,84.035 -6.081,5.284 -3.6,2.803 -3.6,-2.901 216.483,-2.9 216.483,91.8
GND_DIOT on L5 (split plane): 61 vertices, not listed, extent -5.585,-5.052 216.023,94.028
GND on L5 (split plane): 24 vertices, not listed, extent 5,-1.575 136.068,94.028
GND_LLC on L5 (split plane): 166.154,83.954 163.077,80.877 163.077,72.277 160,69.2 152.1,69.2 145.922,63.022 124.342,84.601 124.342,94.028 166.154,94.028
GND_DIOT on L2 (split plane): 87 vertices, not listed, extent -5.585,-5.052 216.023,94.028
GND on L2 (split plane): 42 vertices, not listed, extent 5.102,-1.498 135.966,94.028
GND_LLC on L2 (split plane): 166.052,83.996 163.005,80.949 162.983,80.916 162.975,80.877 162.975,72.319 159.958,69.302 152.1,69.302 152.061,69.294 152.028,69.272 145.922,63.166 124.444,84.644 124.444,94.028 166.052,94.028

## Keep-outs
Keep-Out Layer:
  drawing of 7606 lines, arcs and shapes, not listed

## Other copper
L1:
  rectangle net GND_DIOT: 202.681,42.761 216.168,46.241
  pour cut-out: 97.158,94.539 97.158,68.842 107.4,58.6 132.5,58.6 136.1,55 136,54.9 136,51 133.4,48.4 133.4,6.1 131.8,4.5 127.4,4.5 124.3,1.4 124.3,-0.3 122.8,-1.8 86,-1.8 81.6,2.6 11.9,2.6 9.3,5.2 6.3,5.2 4.8,6.7 4.8,81.4 10.31,86.91 10.31,94.539 3.89,94.539 3.89,87.59 -1.2,82.5 -1.2,9.4 9.2,-1 9.3,-0.9 68.8,-0.9 73.462,-5.562 142.373,-5.562 142.8,-5.136 142.8,44 144.8,46 147.1,46 148.8,47.7 148.8,60.4 147.7,61.5 153.4,67.2 161.1,67.2 165.7,71.8 165.7,80 168.543,82.843 168.543,94.539 166.145,94.539 166.145,84.045 163.2,81.1 163.2,72.4 160,69.2 152.1,69.2 146,63.1 124.452,84.648 124.452,94.539 97.177,94.539
L3:
  pour cut-out: 97.158,94.539 97.158,68.842 107.4,58.6 132.5,58.6 136.1,55 136,54.9 136,51 133.4,48.4 133.4,6.1 131.8,4.5 127.4,4.5 124.3,1.4 124.3,-0.3 122.8,-1.8 86,-1.8 81.6,2.6 11.9,2.6 9.3,5.2 6.3,5.2 4.8,6.7 4.8,81.4 10.31,86.91 10.31,94.539 3.89,94.539 3.89,87.59 -1.2,82.5 -1.2,9.4 9.2,-1 9.3,-0.9 68.8,-0.9 73.462,-5.562 142.373,-5.562 142.8,-5.136 142.8,44 144.8,46 147.1,46 148.8,47.7 148.8,60.4 147.7,61.5 153.4,67.2 161.1,67.2 165.7,71.8 165.7,80 168.543,82.843 168.543,94.539 166.145,94.539 166.145,84.045 163.2,81.1 163.2,72.4 160,69.2 152.1,69.2 146,63.1 124.452,84.648 124.452,94.539 97.177,94.539
L4:
  pour cut-out: 97.158,94.539 97.158,68.842 107.4,58.6 132.5,58.6 136.1,55 136,54.9 136,51 133.4,48.4 133.4,6.1 131.8,4.5 127.4,4.5 124.3,1.4 124.3,-0.3 122.8,-1.8 86,-1.8 81.6,2.6 11.9,2.6 9.3,5.2 6.3,5.2 4.8,6.7 4.8,81.4 10.31,86.91 10.31,94.539 3.89,94.539 3.89,87.59 -1.2,82.5 -1.2,9.4 9.2,-1 9.3,-0.9 68.8,-0.9 73.462,-5.562 142.373,-5.562 142.8,-5.136 142.8,44 144.8,46 147.1,46 148.8,47.7 148.8,60.4 147.7,61.5 153.4,67.2 161.1,67.2 165.7,71.8 165.7,80 168.543,82.843 168.543,94.539 166.145,94.539 166.145,84.045 163.2,81.1 163.2,72.4 160,69.2 152.1,69.2 146,63.1 124.452,84.648 124.452,94.539 97.177,94.539
L6:
  pour cut-out: 97.158,94.539 97.158,68.842 107.4,58.6 132.5,58.6 136.1,55 136,54.9 136,51 133.4,48.4 133.4,6.1 131.8,4.5 127.4,4.5 124.3,1.4 124.3,-0.3 122.8,-1.8 86,-1.8 81.6,2.6 11.9,2.6 9.3,5.2 6.3,5.2 4.8,6.7 4.8,81.4 10.31,86.91 10.31,94.539 3.89,94.539 3.89,87.59 -1.2,82.5 -1.2,9.4 9.2,-1 9.3,-0.9 68.8,-0.9 73.462,-5.562 142.373,-5.562 142.8,-5.136 142.8,44 144.8,46 147.1,46 148.8,47.7 148.8,60.4 147.7,61.5 153.4,67.2 161.1,67.2 165.7,71.8 165.7,80 168.543,82.843 168.543,94.539 166.145,94.539 166.145,84.045 163.2,81.1 163.2,72.4 160,69.2 152.1,69.2 146,63.1 124.452,84.648 124.452,94.539 97.177,94.539
L2 (plane layer: these items are gaps in the copper):
  region: 9.1,-0.9 69.3,-0.9 71.5,-3.1 72.2,-3.8 141.7,-3.8 142.641,-2.859 142.641,43.948 144.468,45.775 146.768,45.775 148.568,47.575 148.568,60.375 147.343,61.6 153.043,67.3 161.1,67.3 165.6,71.8 165.6,79.9 168.519,82.819 168.519,94.539 166.154,94.539 166.154,83.954 163.077,80.877 163.077,72.277 160,69.2 152.1,69.2 145.922,63.022 124.342,84.601 124.342,94.488 97.231,94.488 97.231,69.112 107.668,58.675 132.668,58.675 136.068,55.275 136.068,50.775 133.568,48.275 133.568,6.175 132.068,4.675 126.408,4.675 124.608,2.875 124.608,0.808 124.298,0.498 124.298,-1.575 86.075,-1.575 81.6,2.9 11.9,2.9 9.5,5.3 6.7,5.3 5,7 5,81.6 10.212,86.812 10.212,94.539 3.65,94.539 3.65,87.45 -1.4,82.4 -1.4,8.8 4.4,3 5.2,3
  lines w0.2: 145.922,63.022 152.1,69.2 ; 145.922,63.022 124.342,84.601 124.342,94.488 97.231,94.488 97.231,69.112 107.668,58.675 132.668,58.675 136.068,55.275 136.068,50.775 133.568,48.275 133.568,6.175 132.068,4.675 128.068,4.675 126.408,4.675 124.608,2.875 124.608,0.808 124.298,0.498 124.298,-1.6 86.1,-1.6 81.6,2.9 11.9,2.9 9.5,5.3 6.7,5.3 5,7 5,81.6 10.212,86.812 10.212,94.539 3.65,94.539 3.65,87.45 -1.4,82.4 -1.4,8.8 4.4,3 5.2,3 9.1,-0.9 69.3,-0.9 71.5,-3.1 72.2,-3.8 141.7,-3.8 142.641,-2.859 142.641,43.948 144.468,45.775 146.768,45.775 148.568,47.575 148.568,60.375 147.343,61.6 153.043,67.3 161.1,67.3 165.6,71.8 165.6,79.9 168.519,82.819 168.519,94.539 166.154,94.539 166.154,83.954 163.077,80.877 163.077,72.277 160,69.2 152.1,69.2 ; 145.922,63.022 145.922,63.022 ; 152.1,69.2 152.1,69.2
L5 (plane layer: these items are gaps in the copper):
  region: 9.1,-0.9 69.3,-0.9 71.5,-3.1 72.2,-3.8 141.7,-3.8 142.641,-2.859 142.641,43.948 144.468,45.775 146.768,45.775 148.568,47.575 148.568,60.375 147.343,61.6 153.043,67.3 161.1,67.3 165.6,71.8 165.6,79.9 168.519,82.819 168.519,94.539 166.154,94.539 166.154,83.954 163.077,80.877 163.077,72.277 160,69.2 152.1,69.2 145.922,63.022 124.342,84.601 124.342,94.488 97.231,94.488 97.231,69.112 107.668,58.675 132.668,58.675 136.068,55.275 136.068,50.775 133.568,48.275 133.568,6.175 132.068,4.675 126.408,4.675 124.608,2.875 124.608,0.808 124.298,0.498 124.298,-1.575 86.075,-1.575 81.6,2.9 11.9,2.9 9.5,5.3 6.7,5.3 5,7 5,81.6 10.212,86.812 10.212,94.539 3.65,94.539 3.65,87.45 -1.4,82.4 -1.4,8.8 4.4,3 5.2,3

## Silkscreen, mask and mechanical layers (free items; w line width, h text height)
Top Overlay:
  text "GND" at 192.2,90.111 h1
  text "N18V0" at 76.5,79.512 h1
  text "GND" at 47.2,79.061 h1
  text "N15V0" at 69.7,78.611 h1
  text "P1V1 VDD" at 39,77.4 h1
  text "N6V0" at 76.5,77.011 h1
  text "P1V1 IO" at 51.1,75.761 h1
  text "P3V3 ADC" at 28.5,75.211 h1
  text "P5V0" at 16.1,72.661 h1
  text "CH B" at 58.8,68.772 h2
  text "N5V0" at 5.1,67.811 h1
  text "GND" at 176.6,66.311 h1
  text "P6V0" at 73.489,60.1 h1 r90
  text "P18V0" at 73.8,56.812 h1
  text "P3V0 REF" at 59.4,56.661 h1
  text "GND" at 50.1,52.161 h1
  text "N15V0" at 37.539,49.4 h1 r90
  text "P15V0" at 39.039,49.4 h1 r90
  text "P/N5V0" at 40.539,49.4 h1 r90
  text "P3V3 CLK" at 42.039,49.4 h1 r90
  text "P3V3 VCCO" at 43.539,49.4 h1 r90
  text "P3V3 ISO" at 45.038,49.4 h1 r90
  text "AFE EN" at 46.55,49.4 h1 r90
  text "P1V1" at 48.05,49.4 h1 r90
  text "P15V0" at 81.9,48.711 h1
  text "MOSI" at 24.2,43.762 h1
  text "CLK" at 27.1,43.761 h1
  text "MISO" at 29.6,43.762 h1
  text "P3V0 ISO" at 106.7,43.212 h1
  text "P2V5 REF" at 89.668,33.011 h1
  text "WUT ISE 2025" at 201.875,31.775 h1.02
  text "P3V3 CLK" at 81.368,31.111 h1
  text "Licensed under CERN-OHL-W v2" at 201.15,28.25 h1
  text "VCXO TUNE" at 99.068,26.811 h1
  text "CH A" at 58.8,24.322 h2
  text "MUXOUT" at 102.868,14.511 h1
  text "OVT" at -2.109,13.284 h1
  text "P3V0 REF" at 59.4,12.211 h1
  text "GND" at 169.4,11.811 h1
  text "GND" at 50.1,7.711 h1
  text "PWR" at -2.892,7.06 h1
  text "P3V3 VCCO" at 87.9,4.311 h1
  text "CSn:" at 92.3,0.917 h1.5
  text "ADC CH B" at 95.794,-1.49 h1 r30
  text "AD9508" at 99.794,-1.49 h1 r30
  text "LNA CH B" at 93.694,-1.59 h1 r30
  text "ADC CH A" at 101.594,-1.59 h1 r30
  text "AD4350" at 103.494,-1.59 h1 r30
  text "VCXO DAC" at 105.494,-1.59 h1 r30
  text "LNA CH A" at 97.628,-1.657 h1 r30
  text "20b_40MS_ADC / v1.0" at 52.5,-2.5 h1.6
Top Solder:
  rectangle: 2.03,-4.909 216.999,-3.112
  region: 202.481,46.243 202.481,42.743 216.444,42.743 216.444,46.243
Bottom Solder:
  rectangle: 1.949,-4.909 216.999,-3.112
  region: 202.481,46.243 202.481,42.743 216.444,42.743 216.444,46.243
Mechanical 1:
  the board outline again, w0.1

## Text inside footprints (layer, text, board x,y; h text height)
J1A: Top Overlay "1" at 32.884,9.956 h1.2 r180
J1B: Top Overlay "1" at 32.884,54.406 h1.2 r180
J2: Top Overlay "1" at 201.695,69.664 h1.2 r270; Mechanical 14 "1" at 201.695,69.664 h1.2 r270
J6: Drill Drawing "Diam. 0.5mm +/-0.05" at 215.133,12.988 h1 r180; Drill Drawing "PRESS-FIT TECHNOLOGY" at 215.133,11.488 h1 r180; Mechanical 14 "6" at 194.433,8.638 h1 r90; Mechanical 14 "5" at 194.433,6.638 h1 r90; Mechanical 14 "4" at 194.433,4.638 h1 r90; Mechanical 14 "3" at 194.433,2.638 h1 r90; Mechanical 14 "2" at 194.433,0.638 h1 r90; Mechanical 14 "1" at 194.433,-1.362 h1 r90; Mechanical 14 "L" at 199.483,-3.212 h1 r90; Mechanical 14 "K" at 200.883,-3.212 h1 r90; Mechanical 14 "J" at 202.283,-3.212 h1 r90; Mechanical 14 "I" at 203.683,-2.962 h1 r90; Mechanical 14 "H" at 205.083,-3.212 h1 r90; Mechanical 14 "G" at 206.483,-3.212 h1 r90; Mechanical 14 "F" at 207.883,-3.212 h1 r90; Mechanical 14 "E" at 209.283,-3.212 h1 r90; Mechanical 14 "D" at 210.683,-3.212 h1 r90; Mechanical 14 "C" at 212.083,-4.212 h1 r90; Mechanical 14 "B" at 213.483,-4.212 h1 r90; Mechanical 14 "A" at 214.883,-4.212 h1 r90; Mechanical 8 "Edge of Daugher Card" at 217.233,0.763 h0.5 r90; Mechanical 8 "Top Surface of Mother Board" at 228.733,-0.387 h0.5 r90
J7: Top Overlay "A" at 214.887,72.788 h1 r90; Top Overlay "B" at 213.483,72.59 h1 r90; Top Overlay "C" at 212.083,72.788 h1 r90; Top Overlay "D" at 210.683,73.788 h1 r90; Top Overlay "E" at 209.283,73.114 h1 r90; Top Overlay "F" at 207.883,73.059 h1 r90; Top Overlay "G" at 206.483,73.788 h1 r90; Top Overlay "H" at 205.083,73.788 h1 r90; Top Overlay "I" at 203.683,74.038 h1 r90; Top Overlay "J" at 202.279,73.788 h1 r90; Top Overlay "K" at 200.883,73.788 h1 r90; Top Overlay "L" at 199.479,73.788 h1 r90; Drill Drawing "PRESS-FIT TECHNOLOGY" at 215.133,92.488 h1 r180; Drill Drawing "Diam. 0.5mm +/-0.05" at 215.133,93.988 h1 r180; Mechanical 14 "A" at 214.883,72.788 h1 r90; Mechanical 14 "B" at 213.483,72.788 h1 r90; Mechanical 14 "C" at 212.083,72.788 h1 r90; Mechanical 14 "D" at 210.683,73.788 h1 r90; Mechanical 14 "E" at 209.283,73.788 h1 r90; Mechanical 14 "F" at 207.883,73.788 h1 r90; Mechanical 14 "G" at 206.483,73.788 h1 r90; Mechanical 14 "H" at 205.083,73.788 h1 r90; Mechanical 14 "I" at 203.683,74.038 h1 r90; Mechanical 14 "J" at 202.283,73.788 h1 r90; Mechanical 14 "K" at 200.883,73.788 h1 r90; Mechanical 14 "L" at 199.483,73.788 h1 r90; Mechanical 14 "1" at 194.433,75.638 h1 r90; Mechanical 14 "2" at 194.433,77.638 h1 r90; Mechanical 14 "3" at 194.433,79.638 h1 r90; Mechanical 14 "4" at 194.433,81.638 h1 r90; Mechanical 14 "5" at 194.433,83.638 h1 r90; Mechanical 14 "6" at 194.433,85.638 h1 r90; Mechanical 14 "8" at 194.433,89.638 h1 r90; Mechanical 14 "7" at 194.433,87.638 h1 r90; Mechanical 8 "Top Surface of Mother Board" at 228.733,78.613 h0.5 r90; Mechanical 8 "Edge of Daugher Card" at 217.233,79.763 h0.5 r90
J8: Mechanical 14 "30" at 195.724,21.623 h1.02 r270
J9: Top Overlay "30" at 178.768,21.622 h1.02 r270; Mechanical 14 "30" at 176.954,21.622 h1.02 r270
LD9: Mechanical 8 "K" at -4.971,14.894 h0.5 r270
LD11: Mechanical 8 "K" at -4.971,9.382 h0.5 r270